# Altium PCB Activity_Recognition_Board_v1.0_PCB.PcbDoc
Units mm, origin at the board's own origin, x right, y up, seen from the top; angles counter-clockwise.
Board outline 34.16 x 42.91 mm, 4 copper layers (Top Layer, GND, VCC, Bottom Layer), stack 0.778 mm thick; 112 components, 87 nets, 431 pads, 115 vias.
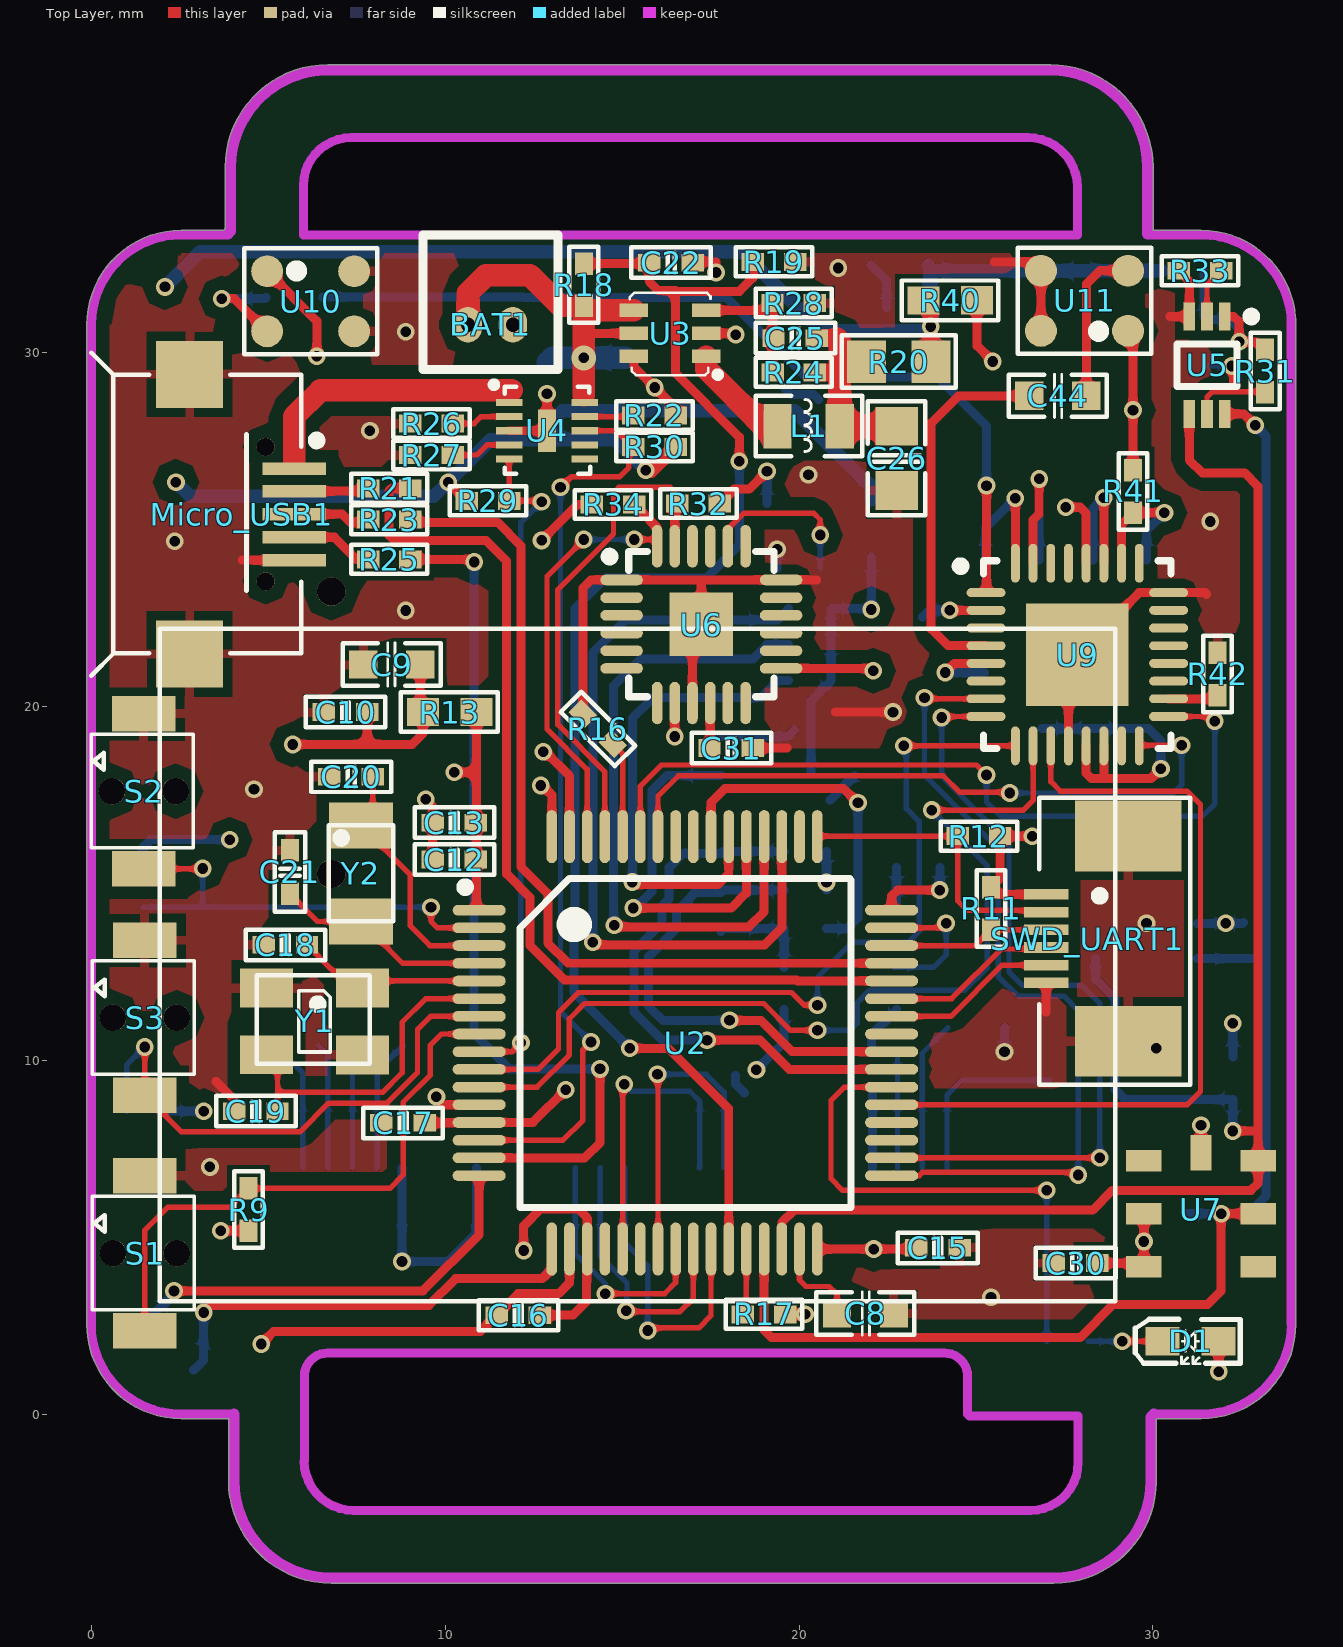
[diagram p0: Top Layer view]
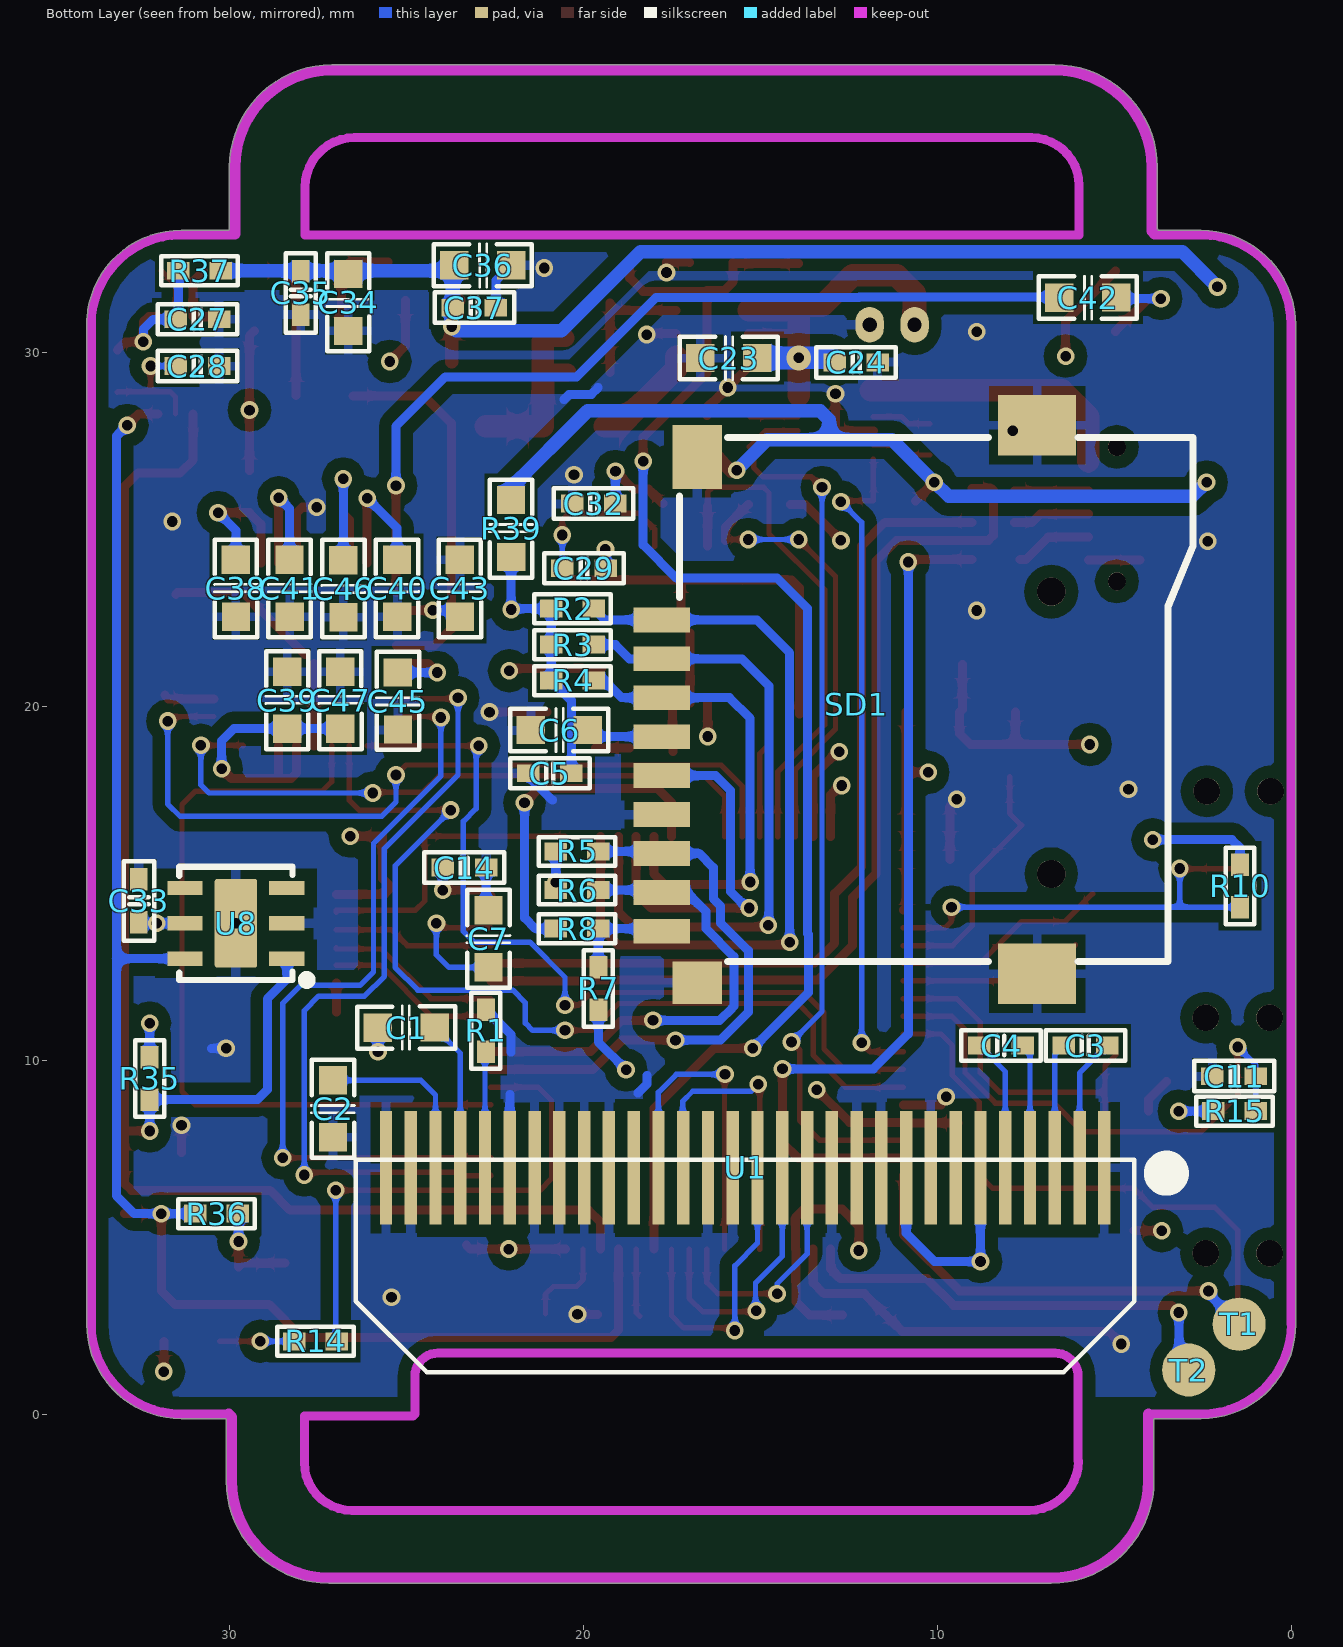
[diagram p1: Bottom Layer view, seen from below]
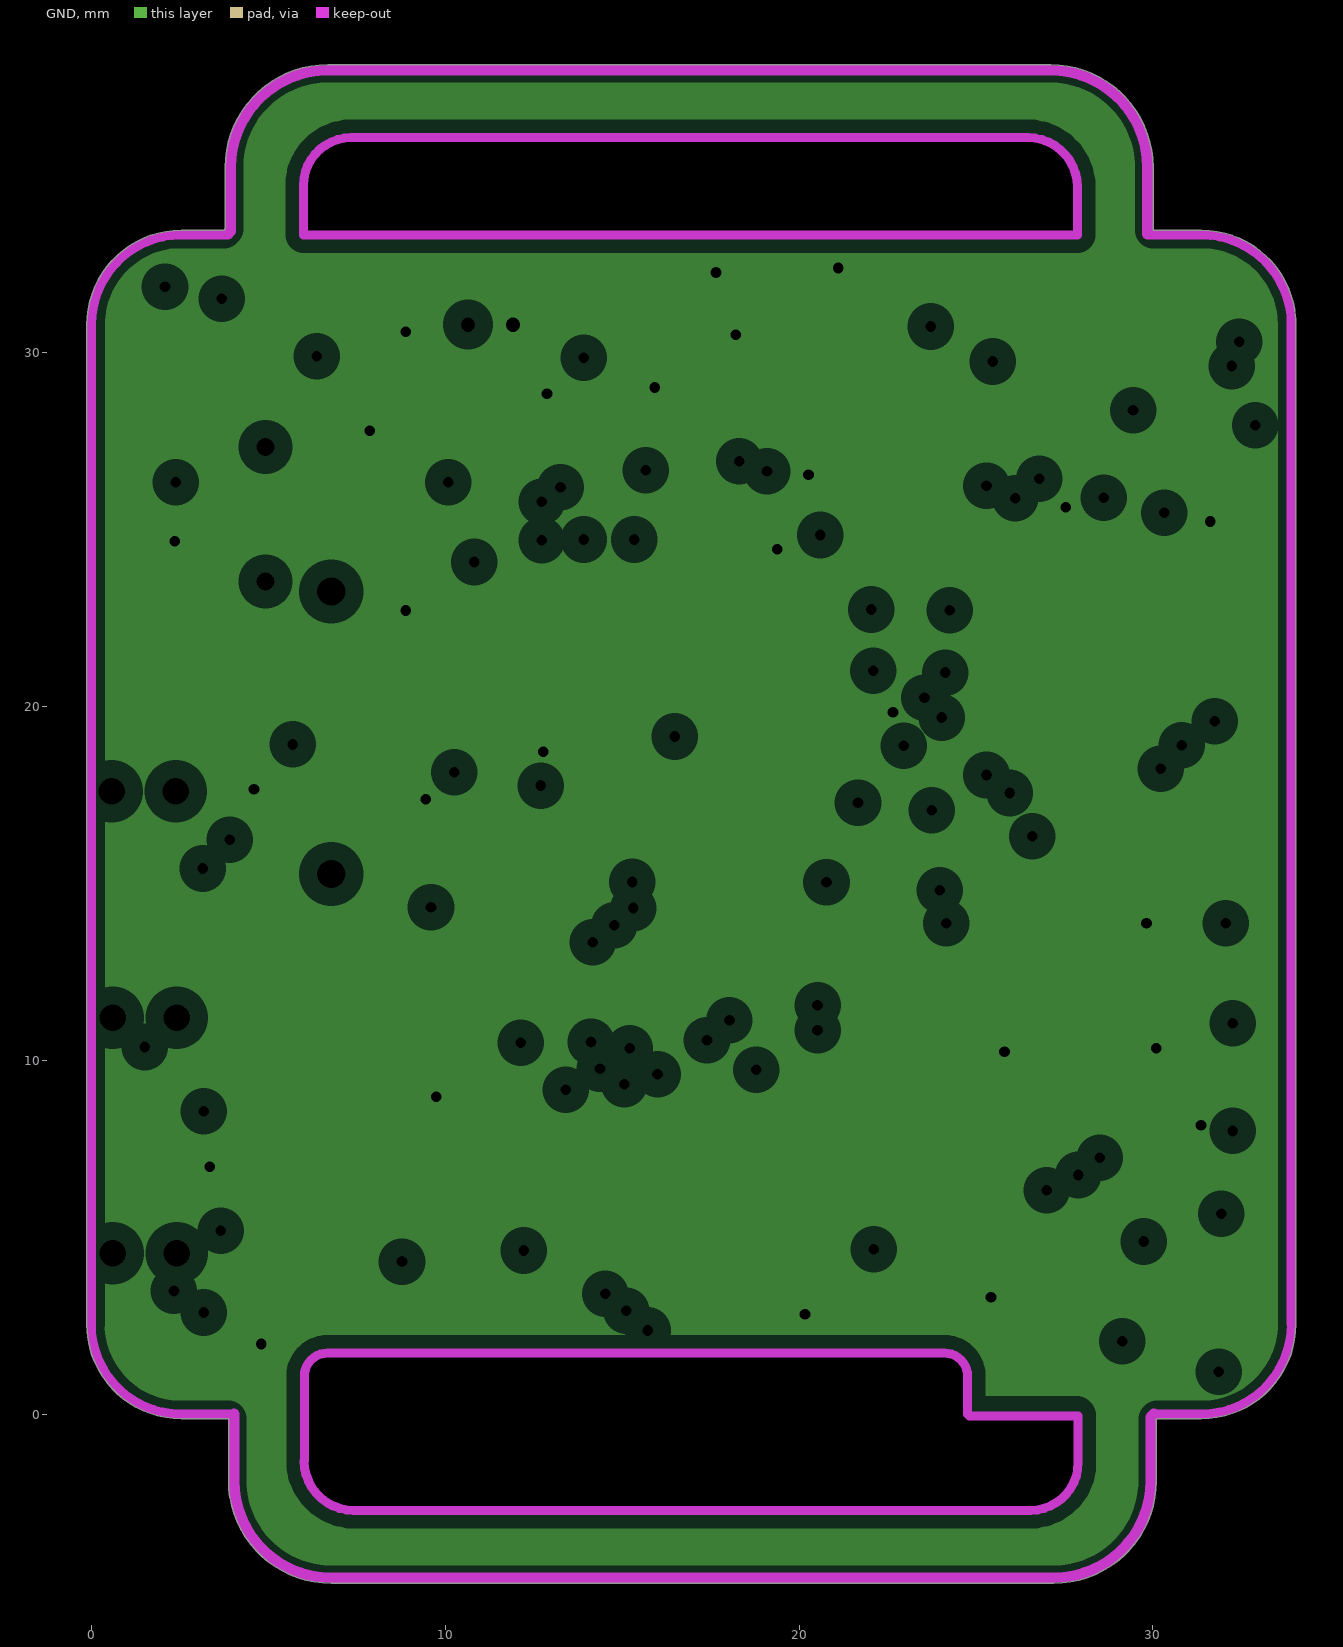
[diagram p2: GND, clearances drawn from the general rule]
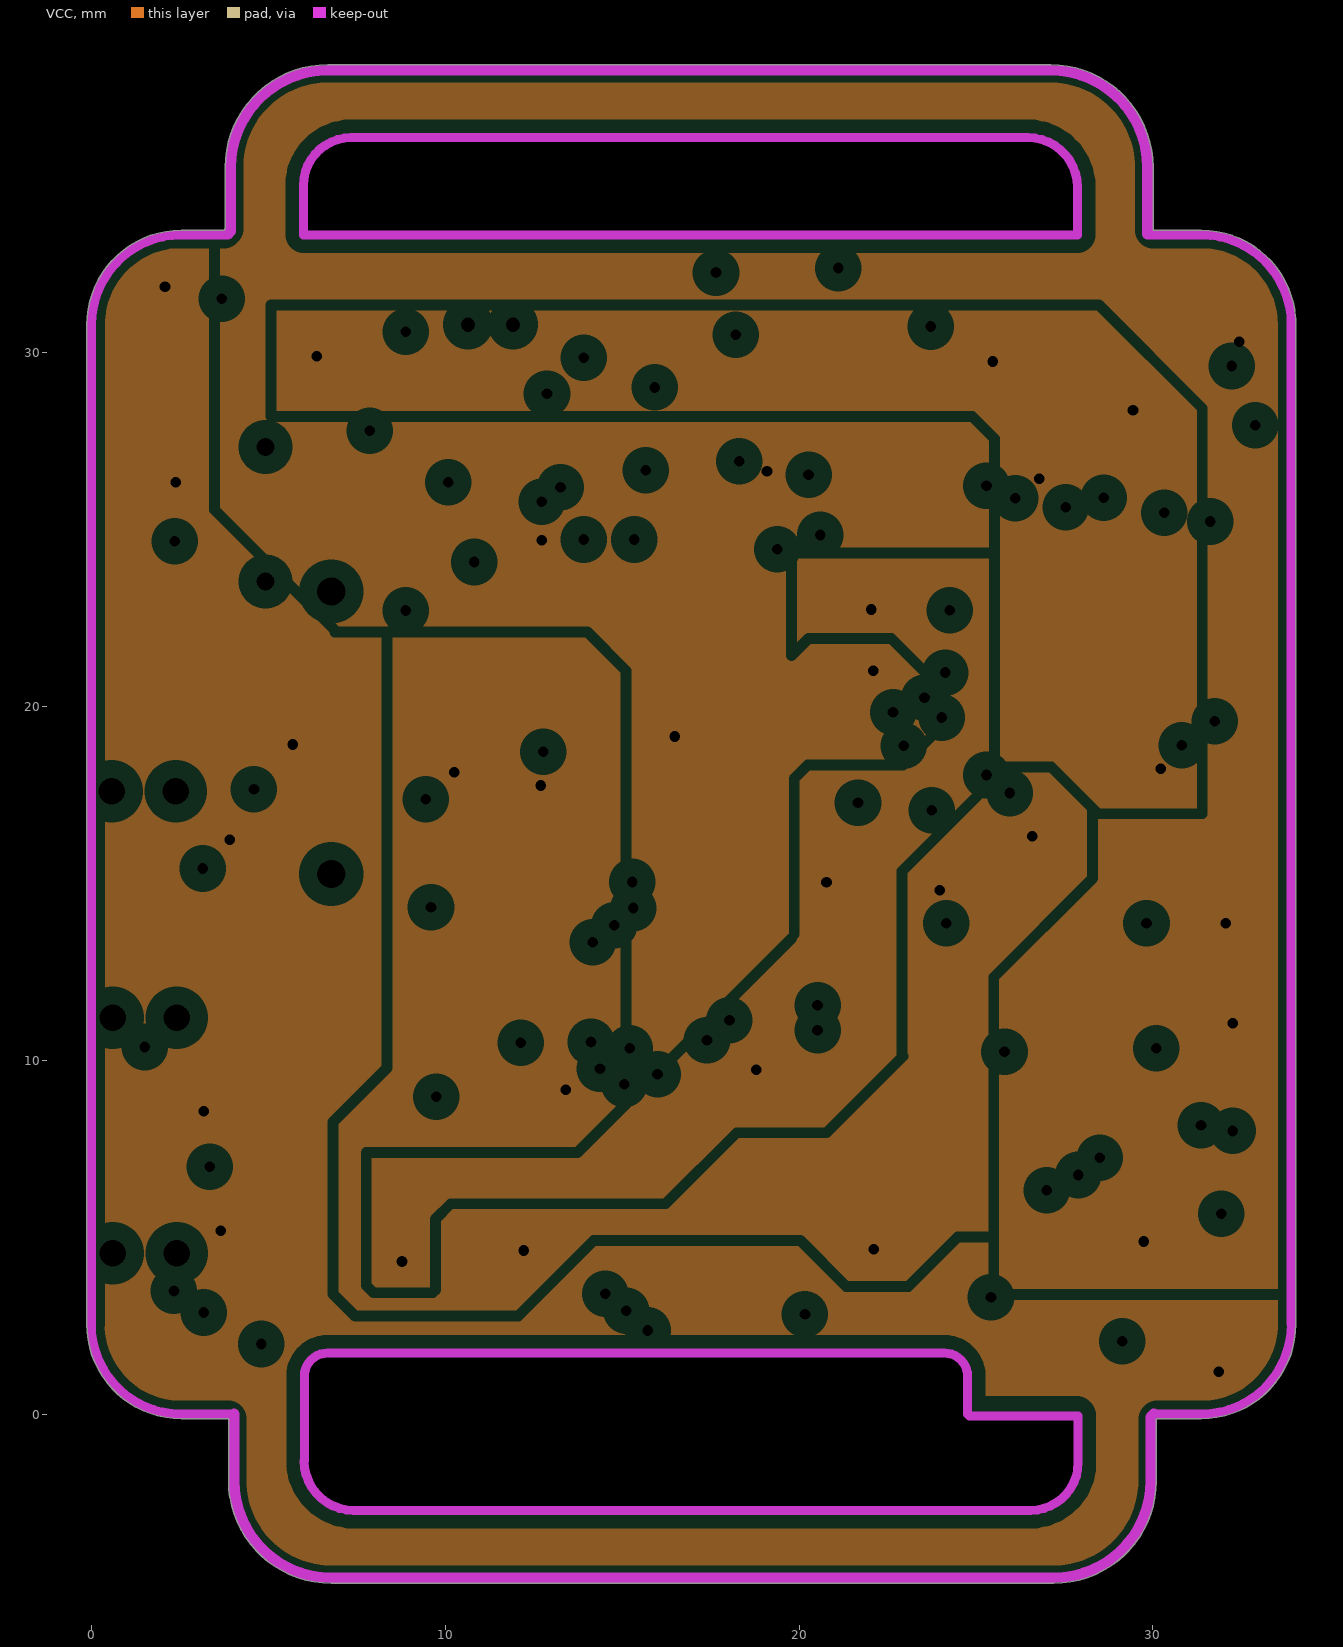
[diagram p3: VCC, clearances drawn from the general rule]

## Layer stack, top to bottom
Top Solder: solder mask 0.0102, Solder Resist, Dk 3.5
Top Layer: signal copper 0.0356
Dielectric 1: core 0.254, FR-4, Dk 4.2
GND: plane copper 0.036, net GND
Dielectric 3: prepreg 0.127, Dk 4.2
VCC: plane copper 0.036, net (Multiple Nets)
Dielectric 2: core 0.254, Dk 4.2
Bottom Layer: signal copper 0.0356
Bottom Solder: solder mask 0.0102, Solder Resist, Dk 3.5

## Board outline
-0.127,2.54 ccw(c2.54,2.54) 2.54,-0.127 3.881,-0.127 3.881,-1.883 ccw(c6.778,-1.883) 6.778,-4.78 27.199,-4.78 ccw(c27.199,-1.883) 30.096,-1.883 30.096,-0.143 30.111,-0.127 31.369,-0.127 ccw(c31.369,2.54) 34.036,2.54 34.036,30.937 ccw(c33.909,30.937) 34.029,30.979 ccw(c31.369,30.785) 31.369,33.452 30.003,33.452 30.003,35.233 ccw(c27.106,35.233) 27.106,38.13 6.684,38.13 ccw(c6.684,35.233) 3.787,35.233 3.787,33.493 3.753,33.458 ccw(c3.861,33.35) 3.747,33.452 2.545,33.452 ccw(c2.545,30.785) -0.122,30.785 -0.122,2.575 ccw(c0,2.54)
cut-out: 6.02,-1.322 ccw(c7.416,-1.322) 7.416,-2.718 26.541,-2.718 ccw(c26.541,-1.37) 27.889,-1.37 27.889,-0.051 ccw(c27.838,-0.051) 27.838,0 24.765,0 24.765,1.067 ccw(c24.105,1.067) 24.105,1.727 6.68,1.727 ccw(c6.68,1.067) 6.02,1.067
cut-out: 5.994,33.325 27.864,33.325 27.864,34.677 ccw(c26.472,34.677) 26.472,36.068 7.342,36.068 ccw(c7.342,34.72) 5.994,34.72

## Design rules (kind name [scope] priority, off if disabled: settings)
Clearance [All] p1: gap=0.152
ComponentClearance [All] p1: gap=0.254 collisioncheckmode=3 verticalgap=-0.254 showdistances=FALSE
MinimumSolderMaskSliver [All] p1: minsoldermaskwidth=-0.254
PlaneClearance [All] p1: clearance=0.508
PlaneConnect [All] p1: planeconnectstyle=Direct reliefexpansion=0.508 reliefentries=4 reliefconductorwidth=0.254 reliefairgap=0.254
PolygonConnect [All] p1: connectstyle=Relief reliefconductorwidth=0.254 reliefentries=4 polygonreliefangle="90 Angle" airgapwidth=0.254
RoomDefinition AR_Sensor [InComponentClass('AR_Sensor')] p1: confinementstyle=ConfineOut formatcopy=TRUE lockcomponents=FALSE outline 56.388,71.044 42.545,71.044 42.545,79.807 56.388,79.807
RoomDefinition AR_Power [InComponentClass('AR_Power')] p2: confinementstyle=ConfineOut formatcopy=TRUE lockcomponents=FALSE outline 40.132,69.647 27.813,69.647 27.813,79.68 40.132,79.68
RoomDefinition AR_Mcu [InComponentClass('AR_Mcu')] p3: confinementstyle=ConfineOut formatcopy=TRUE lockcomponents=FALSE outline 26.289,71.044 11.303,71.044 11.303,79.299 26.289,79.299
RoomDefinition AR_Display_store [InComponentClass('AR_Display_store')] p4: confinementstyle=ConfineOut formatcopy=TRUE lockcomponents=FALSE outline -22.733,67.742 -2.032,67.742 -2.032,78.918 -22.733,78.918
RoomDefinition AR_Audio [InComponentClass('AR_Audio')] p5: confinementstyle=ConfineOut formatcopy=TRUE lockcomponents=FALSE outline 10.033,70.917 -1.143,70.917 -1.143,78.918 10.033,78.918
RoutingVias [All] p1: holewidth=0.711 width=1.27 viastyle="Through Hole" minholewidth=0.3 minwidth=0.3 maxholewidth=0.711 maxwidth=1.27
SilkToBoardRegionClearance [All] p1 off:
SilkToSilkClearance [All] p1: silktosilkclearance=-0.254
SilkToSolderMaskClearance [IsPad] p1: minsilkscreentomaskgap=-0.254 clearancetoexposedcopper=TRUE
SolderMaskExpansion [All] p1: expansion=0.102
Width [All] p1: maxlimit=0.762 minlimit=0.152 preferedwidth=0.254
23 further rules are at their usual default settings.

## Classes and differential pairs
component class AR_Sensor: C27 C28 C29 C30 C31 C32 C33 C34 C35 R31 R32 R33 R34 R35 R36 R37 U5 U6 U7 U8
component class AR_Power: BAT1 C22 C23 C24 C25 C26 L1 Micro_USB1 R18 R19 R20 R21 R22 R23 R24 R25 R26 R27 R28 R29 R30 U3 U4
component class AR_Mcu: C7 C8 C9 C10 C11 C12 C13 C14 C15 C16 C17 C18 C19 C20 C21 D1 R9 R10 R11 R12 R13 R14 R15 R16 R17 S1 S2 S3 SWD_UART1 T1 T2 U2 Y1 Y2
component class AR_Display_store: C1 C2 C3 C4 C5 R1 R2 R3 R4 R5 R6 R7 R8 R39 SD1 U1
component class AR_Audio: C36 C37 C38 C39 C40 C41 C42 C43 C44 C45 C46 C47 R40 R41 R42 U9 U10 U11

## Components (designator, comment, footprint, x,y, rotation, side; value= is the part's Value field where it differs from the comment)
BAT1 "BAT" BHDR2_1.87 11.913,30.785 r180 top
C1 "Cap" C0603 24.206,10.922 r0 bottom
C2 "Cap" C0603 27.08,9.433 r270 bottom
C3 "Cap" C0402 5.202,10.414 r0 bottom
C4 "Cap" C0402 7.59,10.414 r0 bottom
C5 "Cap semi" C0402 21.565,18.11 r180 bottom
C6 "Cap semi" C0603 21.488,19.329 r180 bottom
C7 "Cap semi" C0603 22.686,14.234 r270 bottom
C8 "Cap semi" C0603 21.072,2.841 r0 top
C9 "Cap semi" C0603 9.296,21.184 r180 top
C10 "Cap semi" C0402 7.798,19.837 r180 top
C11 "Cap semi" C0402 2.226,9.55 r180 bottom
C12 "Cap semi" C0402 9.647,15.672 r0 top
C13 "Cap semi" C0402 9.647,16.713 r0 top
C14 "Cap semi" C0402 22.753,15.443 r0 bottom
C15 "Cap semi" C0402 24.536,4.699 r180 top
C16 "Cap semi" C0402 11.455,2.794 r0 top
C17 "Cap semi" C0402 8.199,8.23 r0 top
C18 "Cap semi" C0402 4.872,13.259 r0 top
C19 "Cap semi" C0402 4.039,8.56 r0 top
C20 "Cap semi" C0402 6.731,18.009 r0 top
C21 "Cap semi" C0402 5.613,15.931 r270 top
C22 "Cap semi" C0402 16.998,32.537 r180 top
C23 "Cap semi" C0603 16.697,29.841 r180 bottom
C24 "Cap semi" C0402 11.679,29.718 r0 bottom
C25 "Cap semi" C0402 19.279,30.404 r0 top
C26 "Cap semi" C0805 22.758,26.106 r90 top
C27 "Cap semi" C0402 30.297,30.937 r0 bottom
C28 "Cap semi" C0402 30.297,29.616 r0 bottom
C29 "Cap semi" C0402 20.599,23.901 r180 bottom
C30 "Cap semi" C0402 27.203,4.267 r0 top
C31 "Cap semi" C0402 17.47,18.821 r0 top
C32 "Cap semi" C0402 19.096,25.73 r0 bottom
C33 "Cap semi" C0402 32.563,15.118 r270 bottom
C34 "Cap semi" C0603 26.648,32.217 r270 bottom
C35 "Cap semi" C0402 27.991,32.293 r270 bottom
C36 "Cap semi" C0603 23.647,32.461 r180 bottom
C37 "Cap semi" C0402 23.698,31.267 r180 bottom
C38 "Cap semi" C0603 29.82,22.53 r90 bottom
C39 "Cap semi" C0603 28.368,19.371 r90 bottom
C40 "Cap semi" C0603 25.264,22.53 r90 bottom
C41 "Cap semi" C0603 28.301,22.53 r90 bottom
C42 "Cap semi" C0603 6.553,31.547 r180 bottom
C43 "Cap semi" C0603 23.491,22.53 r90 bottom
C44 "Cap semi" C0603 26.508,28.774 r0 top
C45 "Cap semi" C0603 25.248,20.955 r270 bottom
C46 "Cap semi" C0603 26.786,24.13 r270 bottom
C47 "Cap semi" C0603 26.869,19.371 r90 bottom
D1 "LED3" LED0603 31.859,2.057 r180 top
L1 "Inductor" L0805 19.393,27.915 r0 top
Micro_USB1 "Micro_USB" Micro_USB 0.628,25.43 r180 top
R1 "Res1" R0402 22.758,10.236 r90 bottom
R2 "Res3" R0402 19.708,22.758 r0 bottom
R3 "Res3" R0402 19.708,21.742 r0 bottom
R4 "Res3" R0402 19.708,20.726 r0 bottom
R5 "Res3" R0402 19.581,15.9 r0 bottom
R6 "Res3" R0402 19.581,14.808 r0 bottom
R7 "Res3" R0402 19.581,12.624 r270 bottom
R8 "Res3" R0402 19.581,13.716 r0 bottom
R9 "Res3" R0402 4.445,6.378 r270 top
R10 "Res3" R0402 1.448,14.326 r90 bottom
R11 "Res3" R0402 25.425,14.884 r270 top
R12 "Res3" R0402 25.679,16.332 r180 top
R13 "Res3" R0603 10.883,19.841 r180 top
R14 "Res3" R0402 26.972,2.057 r0 bottom
R15 "Res3" R0402 2.198,8.56 r180 bottom
R16 "Res3" R0402 14.74,18.941 r135 top
R17 "Res3" R0402 18.412,2.819 r0 top
R18 "Res2" R0402 13.919,31.316 r90 top
R19 "Res2" R0402 18.694,32.563 r0 top
R20 "Res3" R0805 23.724,29.743 r180 top
R21 "Res3" R0402 9.017,26.162 r180 top
R22 "Res3" R0402 16.51,28.219 r180 top
R23 "Res3" R0402 9.017,25.273 r180 top
R24 "Res2" R0402 19.253,29.439 r0 top
R25 "Res3" R0402 9.017,24.155 r180 top
R26 "Res2" R0402 9.017,27.991 r0 top
R27 "Res2" R0402 9.017,27.102 r0 top
R28 "Res3" R0402 20.447,31.394 r180 top
R29 "Res2" R0402 10.612,25.806 r0 top
R30 "Res2" R0402 16.51,27.33 r180 top
R31 "Res2" R0402 33.172,30.074 r270 top
R32 "Res2" R0402 16.561,25.73 r0 top
R33 "Res2" R0402 31.93,32.309 r180 top
R34 "Res2" R0402 15.342,25.705 r180 top
R35 "Res1" R0402 32.258,8.887 r90 bottom
R36 "Res1" R0402 30.965,5.664 r180 bottom
R37 "Res3" R0402 31.445,32.309 r180 bottom
R39 "Res2" C0603 22.043,24.222 r90 bottom
R40 "Res3" R0603 25.031,31.474 r180 top
R41 "Res3" R0402 29.439,26.67 r270 top
R42 "Res3" R0402 31.826,20.317 r90 top
S1 "SW-PB" MP34 1.513,2.352 r90 top
S2 "SW-PB" MP34 1.484,15.407 r90 top
S3 "SW-PB" MP34 1.513,9.006 r90 top
SD1 "SD Card" SDCARD-M 6.782,20.193 r180 bottom
SWD_UART1 "SWD_UART" FFC_6 28.143,13.437 r270 top
T1 "Test_Point" Test_Point 1.448,2.565 r180 bottom
T2 "Test_Point" Test_Point 2.87,1.27 r180 bottom
U1 "SSD1306" OLED_Bare 5.282,7.188 r0 top
U2 "STM32F405RG" LQFP64 16.764,10.49 r0 top
U3 "TPS62260" QFN-6 16.358,30.531 r180 top
U4 "BQ24040" WSON10 12.878,27.788 r0 top
U5 "BH1750FVI" WSOF6I 31.529,29.638 r270 top
U6 "MPU6050" QFN-24 14.986,23.571 r0 top
U7 "BMP180" LGA7 31.369,5.664 r0 top
U8 "Si7021-A20" Si7021-A10 29.82,13.868 r0 bottom
U9 "WM8978" QFN32 27.864,21.463 r0 top
U10 "MEMS_microphone" Microphone 6.198,31.445 r90 top
U11 "MEMS_microphone" Microphone 28.067,31.46 r270 top
Y1 "25M" 3225 7.669,12.04 r180 top
Y2 "32.768K" 3215 7.62,16.637 r270 top

## Footprints (in the part's own frame and the unit in brackets; to place one, negate y for a bottom-side part, rotate by r counter-clockwise, add the part's x,y. Pads: shape width x height; smd on the part's side, far side on the other; paste and mask are expansions set on the pad)
3215 [mm]
  rect 1.3x1.8 smd paste+0 mask+0.1: 1(0,0)
  rect 1.3x1.8 smd: 2(2.716,0)
  silkscreen extent 0,-0.91 2.72,0.91, body extent 0,-0.91 2.72,0.91, height 0.9
3225 [mm]
  rect 1.5x1.1 smd paste+0 mask+0.1: 1(0,0)
  rect 1.5x1.1 smd: 2(2.716,0) 3(2.716,1.885)
  rect 1.5x1.1 smd mask+0.1: 4(0,1.886)
  silkscreen extent -0.2,-0.36 3,2.14, body extent 0,-0.28 2.79,2.16, height 0.9
BHDR2_1.87 [mm]
  oval 0.8x1 hole 0.4: 1(0,0) 2(1.27,0)
  silkscreen extent -1.27,-2.54 2.54,1.27, body extent -1.27,-2.54 2.54,1.27, height 0.8
C0402 [mm]
  rect 0.635x0.5 smd: 1(0,0) 2(1.224,0)
  silkscreen extent -0.51,-0.43 1.74,0.43, body extent 0.01,-0.26 1.22,0.27, height 0.8
C0603 [mm]
  rect 0.8x0.8 smd: 1(0,0) 2(1.61,0.004)
  silkscreen extent -0.58,-0.61 2.18,0.61, body extent 0,-0.4 1.61,0.41, height 0.9
C0805 [mm]
  rect 1.1x1.2 smd: 1(-0.008,0) 2(1.808,0)
  silkscreen extent -0.71,-0.82 2.51,0.81, body extent -0.05,-0.6 1.81,0.61, height 0.8
FFC_6 [mm]
  rect 2x3 smd: 0(-2.902,1.158) 0(2.902,1.158)
  rect 0.3x1.25 smd: 1(-1.248,-1.158) 2(-0.748,-1.158) 3(-0.248,-1.158) 4(0.252,-1.158) 5(0.752,-1.158) 6(1.252,-1.158)
  silkscreen extent -3.99,-1.36 4.13,2.92, body extent -1.81,-1.12 1.79,2.68, height 1
L0805 [mm]
  rect 0.8x1.25 smd: 1(0,0) 2(1.755,0)
  silkscreen extent -0.62,-0.85 2.39,0.87, body extent 0.02,-0.62 1.76,0.65, height 0.9
LED0603 [mm]
  rect 0.96x0.8 smd: 1(0,0) 2(1.582,0)
  silkscreen extent -0.61,-0.62 2.36,0.64, body extent -0.04,-0.39 1.61,0.4, height 0.8
LGA7 [mm] "LGA, 7-Leads, Body 3.60x3.80mmx1.00mm, Pitch 1.50mm"
  rect 1x0.6 smd: 1(-1.623,1.497) 2(-1.623,-0.003) 3(-1.623,-1.503) 4(1.603,-1.503) 5(1.603,-0.003) 6(1.603,1.497)
  rect 0.6x1 smd: 7(-0.01,1.726)
  body extent -1.8,-1.9 1.8,1.9, height 1
LQFP64 [mm] "LQFP64"
  oval 1.5x0.3 smd: 1(-5.802,3.75) 2(-5.802,3.25) 3(-5.802,2.75) 4(-5.802,2.25) 5(-5.802,1.75) 6(-5.802,1.25) 7(-5.802,0.75) 8(-5.802,0.25) 9(-5.802,-0.25) 10(-5.802,-0.75) 11(-5.802,-1.25) 12(-5.802,-1.75) 13(-5.802,-2.25) 14(-5.802,-2.75) 15(-5.802,-3.25) 16(-5.802,-3.75) 33(5.852,-3.75) 34(5.852,-3.25) 35(5.852,-2.75) 36(5.852,-2.25) 37(5.852,-1.75) 38(5.852,-1.25) 39(5.852,-0.75) 40(5.852,-0.25) 41(5.852,0.25) 42(5.852,0.75) 43(5.852,1.25) 44(5.852,1.75) 45(5.852,2.25) 46(5.852,2.75) 47(5.852,3.25) 48(5.852,3.75)
  oval 0.3x1.5 smd: 17(-3.75,-5.827) 18(-3.25,-5.827) 19(-2.75,-5.827) 20(-2.25,-5.827) 21(-1.75,-5.827) 22(-1.25,-5.827) 23(-0.75,-5.827) 24(-0.25,-5.827) 25(0.25,-5.827) 26(0.75,-5.827) 27(1.25,-5.827) 28(1.75,-5.827) 29(2.25,-5.827) 30(2.75,-5.827) 31(3.25,-5.827) 32(3.75,-5.827) 49(3.75,5.827) 50(3.25,5.827) 51(2.75,5.827) 52(2.25,5.827) 53(1.75,5.827) 54(1.25,5.827) 55(0.75,5.827) 56(0.25,5.827) 57(-0.25,5.827) 58(-0.75,5.827) 59(-1.25,5.827) 60(-1.75,5.827) 61(-2.25,5.827) 62(-2.75,5.827) 63(-3.25,5.827) 64(-3.75,5.827)
  silkscreen extent -6.32,-4.65 4.7,4.65, body extent -4.67,-4.65 4.7,4.65, height 0.9
Micro_USB [mm]
  rect 1.8x0.35 smd: 1(-5.106,-1.287) 2(-5.106,-0.65) 3(-5.106,0) 4(-5.106,0.65) 5(-5.106,1.3)
  round 0.508 hole 0.508 unplated: MH1(-4.3,1.9) MH2(-4.3,-1.9)
  rect 1.9x1.9 smd: ""(-2.15,3.95) ""(-2.15,-3.95)
  silkscreen extent -5.87,-4.57 0.63,4.57, body extent -5.19,-3.79 -0.16,3.79, height 0.9
Microphone [mm]
  round 0.9 smd: 1(0.85,1.23) 2(0.85,-1.23) 3(-0.85,-1.23) 4(-0.85,1.23)
  silkscreen extent -1.5,-1.88 1.5,1.88, body extent -1.44,-1.83 1.42,1.78, height 0.8
MP34 [mm]
  round 0.75 hole 0.75: 0(2.195,-0.9) 0(2.195,0.9)
  rect 1x1.8 smd: 1(0,0) 2(4.38,0)
  silkscreen extent 0.6,-1.4 3.81,1.49, body extent 0.59,-1.41 3.81,1.41, height 0.9
OLED_Bare [mm]
  rect 0.35x3.2 smd far side: 1(0,-0.229) 2(0.7,-0.229) 3(1.4,-0.229) 4(2.1,-0.229) 5(2.8,-0.229) 6(3.5,-0.229) 7(4.2,-0.229) 8(4.9,-0.229) 9(5.6,-0.229) 10(6.3,-0.229) 11(7,-0.229) 12(7.7,-0.229) 13(8.4,-0.229) 14(9.1,-0.229) 15(9.8,-0.229) 16(10.5,-0.229) 17(11.2,-0.229) 18(11.9,-0.229) 19(12.6,-0.229) 20(13.3,-0.229) 21(14,-0.229) 22(14.7,-0.229) 23(15.4,-0.229) 24(16.1,-0.229) 25(16.8,-0.229) 26(17.5,-0.229) 27(18.2,-0.229) 28(18.9,-0.229) 29(19.6,-0.229) 30(20.3,-0.229)
  silkscreen extent -3.35,-4 23.65,15, body extent -3.18,-3.84 23.49,14.85, height 0.9
QFN32 [mm] "QFN, 32-Leads, Body 5.00x5.00mm, Pitch 0.50mm, Thermal Pad 2.90x2.90mm, IPC Medium Density"
  oval 1.1x0.25 smd: 1(-2.58,1.75) 2(-2.58,1.25) 3(-2.58,0.75) 4(-2.58,0.25) 5(-2.58,-0.25) 6(-2.58,-0.75) 7(-2.58,-1.25) 8(-2.58,-1.75) 17(2.58,-1.75) 18(2.58,-1.25) 19(2.58,-0.75) 20(2.58,-0.25) 21(2.58,0.25) 22(2.58,0.75) 23(2.58,1.25) 24(2.58,1.75)
  oval 0.25x1.1 smd: 9(-1.75,-2.58) 10(-1.25,-2.58) 11(-0.75,-2.58) 12(-0.25,-2.58) 13(0.25,-2.58) 14(0.75,-2.58) 15(1.25,-2.58) 16(1.75,-2.58) 25(1.75,2.581) 26(1.25,2.581) 27(0.75,2.581) 28(0.25,2.581) 29(-0.25,2.581) 30(-0.75,2.581) 31(-1.25,2.581) 32(-1.75,2.581)
  rect 2.9x2.9 smd: 33(0,0)
  silkscreen extent -3.42,-2.65 2.65,2.65, body extent -2.5,-2.5 2.5,2.5, height 1
QFN-6 [mm] "SON, 6-Leads, Body 2.00x2.00mm, Pitch 0.65mm, Thermal Pad 1.60x0.74mm, IPC Medium Density"
  rect 0.8x0.381 smd: 1(-1.024,0.64) 2(-1.024,-0.01) 3(-1.024,-0.66) 4(1.024,-0.66) 5(1.024,-0.01) 6(1.024,0.64)
  silkscreen extent -1.4,-1.15 1.14,1.21, body extent -0.95,-0.96 0.95,0.94, height 0.8
QFN-24 [mm]
  rect 1.8x1.8 smd: 0(2.253,-1.25)
  oval 1.2x0.3 smd: 1(0,0) 2(0,-0.5) 3(0,-1) 4(0,-1.5) 5(0,-2) 6(0,-2.5) 13(4.506,-2.5) 14(4.506,-2) 15(4.506,-1.5) 16(4.506,-1) 17(4.506,-0.5) 18(4.506,0)
  oval 0.3x1.2 smd: 7(1.003,-3.478) 8(1.503,-3.478) 9(2.003,-3.478) 10(2.503,-3.478) 11(3.003,-3.478) 12(3.503,-3.478) 19(3.503,0.952) 20(3.003,0.952) 21(2.503,0.952) 22(2.003,0.952) 23(1.503,0.952) 24(1.003,0.952)
  silkscreen extent -0.47,-3.3 4.3,0.8, body extent 0.2,-3.3 4.3,0.8, height 0.9
R0402 [mil]
  rect 25x20 smd: 1(0,0) 2(47.1,0)
  silkscreen extent -19,-16 66,16, body extent -1,-11 50,11, height 31
R0603 [mm]
  rect 0.91x0.8 smd: 1(0,0) 2(1.511,0.004)
  silkscreen extent -0.6,-0.56 2.13,0.56, body extent -0.04,-0.39 1.61,0.4, height 0.8
R0805 [mm]
  rect 1.1x1.2 smd: 1(0,0) 2(1.816,0)
  silkscreen extent -0.71,-0.74 2.51,0.74, body extent -0.04,-0.6 1.82,0.61, height 0.8
SDCARD-M [mm] "TF卡"
  round 0.8 hole 0.8: 0(0,-4.93) 0(0,3.05)
  rect 1.6x0.7 smd: 1(-11.008,2.25) 2(-11.008,1.15) 3(-11.008,0.05) 4(-11.008,-1.05) 5(-11.008,-2.15) 6(-11.008,-3.25) 7(-11.008,-4.35) 8(-11.008,-5.45) 9(-11.008,-6.55)
  rect 1.4x1.2 smd: 10(-10,-8.004)
  rect 2.2x1.7 smd: 11(-0.4,-7.75) 13(-0.4,7.75)
  rect 1.4x1.8 smd: 12(-10,6.85)
  silkscreen extent -10.5,-7.4 4,7.4, body extent -10.33,-7.26 3.83,7.26, height 0.9
Si7021-A10 [mm] "SON, 6-Leads, Body 2.85x2.85mm, Pitch 1.00mm, Thermal Pad 2.40x1.48mm, IPC Medium Density"
  rrect10% 1.2x2.5 smd: 0(0,0)
  rect 1x0.4 smd: 1(-1.44,1) 2(-1.44,0) 3(-1.44,-1) 4(1.44,-1) 5(1.44,0) 6(1.44,1)
  silkscreen extent -2.05,-1.6 1.6,1.65, body extent -1.45,-1.45 1.45,1.45, height 1.2
Test_Point [mm]
  round 1.5 smd: 1(-0.025,-0.025)
WSOF6I [mm] "SOTFL, 6-Leads, Body 1.60x3.00mm, Pitch 0.50mm, IPC Medium Density"
  rect 0.8x0.33 smd: 1(-1.375,0.5) 2(-1.375,0) 3(-1.375,-0.5) 4(1.375,-0.5) 5(1.375,0) 6(1.375,0.5)
  silkscreen extent -1.5,-0.85 0.6,1.38, body extent -1.35,-0.85 1.35,0.85, height 0.75
WSON10 [mm]
  rect 0.5x1.2 smd: 0(0,0)
  rect 0.75x0.2 smd: 1(-1.072,0.8) 2(-1.072,0.4) 3(-1.072,0) 4(-1.072,-0.4) 5(-1.072,-0.8) 6(1.072,-0.8) 7(1.072,-0.4) 8(1.072,0) 9(1.072,0.4) 10(1.072,0.8)
  silkscreen extent -1.55,-1.22 1.22,1.35, body extent -1.05,-1.05 1.05,1.05, height 0.8

## Part data
BAT1: library part BAT_CN, "BAT_CN"
C1 C2 C3 C4: "Capacitor"
C5 C6 C7 C8 C9 C10 C11 C12 C13 C14 C15 C16 C17 C18 C19 C20 C21 C22 C23 C24 C25 C26 C27 C28 C29 C30 C31 C32 C33 C34 C35 C36 C37 C38 C39 C40 C41 C42 C43 C44 C45 C46 C47: "Capacitor (Semiconductor SIM Model)"
D1: "Typical BLUE SiC LED"
Micro_USB1: library part Micri_USB
R1 R2 R3 R4 R5 R6 R7 R8 R9 R10 R11 R12 R13 R14 R15 R16 R17 R18 R19 R20 R21 R22 R23 R24 R25 R26 R27 R28 R29 R30 R31 R32 R33 R34 R35 R36 R37 R39 R40 R41 R42: "Resistor"
S1 S2 S3: "Switch"
SD1: library part Micro_SD_Card, "SD card socket"
U3: "DC-DC buck"
Y1 Y2: library part XTAL, "Crystal Oscillator"

## Via types
v1: diameter 0.5, hole 0.3, Top Layer to Bottom Layer, tented both sides, 114 vias
v2: diameter 0.7, hole 0.3, Top Layer to Bottom Layer, tented both sides, 1 vias

## Nets (pads, with @x,y where several pads share a name; then routed paths per layer and width w, separated by ;. In a path a pad name is that pad's centre, name@x,y a point inside that pad or via, vN(x,y) a via of type N, cw(c..) or ccw(c..) an arc to the next point about the centre after c; other vN are vias at no path point)
3V3: C9.1 C10.1 C34.1 C35.1 C36.1 C37.1 D1.1 R9.2 R10.2 R13.2 R15.1 R20.1 R29.1 R30.1 R37.2 R39.2 R40.2 | length 72.9
  Top Layer w0.254: v1(3.658,5.182) R9.2 ; v1(5.69,18.923) 7.798,18.923 ; C10.1 7.798,18.923 ; C9.1 9.296,19.914 R13.2 9.373,19.228 9.068,18.923 7.798,18.923 ; v1(10.084,26.335) R29.1 ; v1(31.859,1.201) D1.1
  Top Layer w0.381: v1(15.672,26.67) 15.799,26.67 15.824,26.645 R30.1 ; R40.2 23.724,31.267 v1(23.724,30.734) R20.1
  Bottom Layer w0.254: R10.2 1.448,16.002 1.676,16.231 v1(3.912,16.231) ; R15.1 v1(3.175,8.56)
  Bottom Layer w0.381: v1(2.083,31.852) 3.082,32.851 18.381,32.851 20.625,30.607 23.597,30.607 v1(23.724,30.734) 23.724,31.242 C37.1 C36.1@23.698,32.41 ; v1(2.393,26.335) 2.794,25.933 9.682,25.933 v1(10.084,26.335) 11.283,27.534 13.056,27.534 ; v1(15.672,26.67) 14.808,27.534 13.056,27.534 ; R39.2 22.047,26.137 22.094,26.137 19.884,28.346 13.31,28.346 13.056,28.092 13.056,27.534 ; C36.1 C36.1@23.698,32.41 ; R37.2 23.8,32.309 C36.1@23.698,32.41
3V3_OLED: C5.2 C6.2 R2.2 R3.2 R4.2 R5.2 R6.2 R7.2 R39.1 SD1.4 U1.6 U1.9 | length 19.8
  Bottom Layer w0.254: U1.6 v1(8.782,4.311) 10.077,4.311 10.882,5.116 U1.9 ; SD1.4 19.688,19.143 C6.2 ; v1(18.796,9.728) 19.581,10.513 R7.2 ; C5.2 20.34,20.163 R4.2 R3.2 R2.2 22.022,22.758 v1(22.043,22.737) R39.1 ; R5.2 v1(20.777,15.024) R6.2 R6.2@20.809,14.84
BH_VCC: C27.2 C30.2 C32.1 C33.2 R31.1 R32.2 R34.2 R35.2 R36.2 R37.1 U5.1 U6.8 U6.13 U7.2 U7.3 U8.5 | length 18.7
  Top Layer w0.254: v1(12.725,24.689) 13.741,25.705 R34.2 ; v1(16.489,19.147) U6.8 ; R32.2 18.164,26.137 18.593,26.137 v1(19.096,26.64) ; U6.13 21.956,21.071 22.098,20.93 v1(22.098,21.006) ; C30.2 29.64,4.267 U7.3 v1(29.746,4.877) U7.2 ; U5.1 32.283,31.013 32.436,30.861 v1(32.436,30.302) 32.944,30.302 R31.1
  Bottom Layer w0.254: C32.1 v1(19.096,26.64) ; v1(29.746,4.877) 29.746,5.641 R36.2 ; U8.5 v1(32.055,13.868) 32.537,13.868 C33.2 ; R37.1 31.445,31.013 C27.2 32.156,30.937 32.436,30.658 v1(32.436,30.302) ; R35.2 v1(32.258,11.049)
BOOT0: R16.1 U2.60 | length 2.7
  Top Layer w0.152: R16.1 15.014,18.666 U2.60
BOOT1: R17.1 U2.28 | length 1.9
  Top Layer w0.152: R17.1@18.415,2.769 18.514,2.868 U2.28
CHG_STAT: R30.2 U2.14 U4.8 | length 25.9
  Top Layer w0.152: U2.14 13.328,7.74 13.89,8.302 13.89,10.283 v1(14.122,10.516) ; v1(13.259,26.187) 13.564,26.492 14.935,26.492 15.193,26.75 15.193,27.21 R30.2 15.308,27.33 14.851,27.788 U4.8
  Bottom Layer w0.152: v1(13.259,26.187) 13.259,11.379 v1(14.122,10.516)
DVI: C28.2 R31.2 U5.5 | length 3.6
  Top Layer w0.152: U5.5 31.529,28.735 31.686,28.892 32.233,28.892 ; v1(32.233,29.616) 32.233,28.892 ; R31.2 33.158,28.892 32.233,28.892
  Bottom Layer w0.152: C28.2 v1(32.233,29.616)
GND: BAT1.1 C1.2 C2.2 C5.1 C6.1 C7.1 C8.2 C9.2 C10.2 C11.1 C12.1 C13.1 C14.1 C15.1 C16.1 C17.1 C18.1 C19.1 C20.1 C21.1 C22.1 C23.1 C24.1 C26.1 C27.1 C28.1 C29.2 C30.1 C31.2 C32.2 C33.1 C34.2 C35.2 C36.2 C37.2 C38.1 C39.2 C40.1 C41.1 C43.2 C45.2 C46.2 C47.2 Micro_USB1. Micro_USB1.5 R1.2 R16.2 R17.2 R19.2 R22.1 R26.1 R27.1 R28.1 R33.2 R42.2 S1.2 S2.2 S3.2 SD1.6 SD1.10 SD1.11 SD1.12 SD1.13 SWD_UART1.0 SWD_UART1.6 U1.1 U1.8 U1.10 U1.11 U1.12 U1.16 U1.17 U1.21 U1.22 U1.23 U1.24 U1.25 U1.29 U1.30 U2.12 U2.18 U2.63 U3.2 U3.6 U4.0 U4.3 U5.3 U6.0 U6.1 U6.9 U6.18 U7.7 U8.0 U8.2 U9.12 U9.24 U9.28 U9.33 U10.2 U10.3 U11.2 U11.3 Y1.2 Y1.4 | length 67.4
  Top Layer w0.254: 3.531,9.398 4.039,8.89 C19.1 ; 4.267,24.13 Micro_USB1.5 ; v1(4.801,1.981) 5.156,2.337 10.998,2.337 C16.1 12.064,3.402 13.207,3.402 13.514,3.71 U2.18 ; v1(7.874,27.788) v1@7.95,27.788 ; v1(9.449,17.374) 9.647,17.175 C13.1 C12.1 ; v1(9.754,8.966) 9.754,8.89 9.903,8.74 U2.12 ; U4.3 U4.0 v1(12.878,28.829) ; v1(12.776,18.72) 12.827,18.72 13.514,18.033 U2.63 ; R16.2 13.894,23.343 14.122,23.571 U6.1 U6.18 20.498,23.571 ; U3.6 15.334,29.599 v1(15.922,29.011) 16.51,28.423 R22.1 ; U6.9 U6.0@16.989,22.071 ; C22.1 17.023,32.563 17.653,32.563 v1(17.653,32.258) ; U6.0 17.239,23.437 ; U3.2 18.176,30.541 v1(18.212,30.505) ; C31.2 19.66,18.821 ; R17.2 v1(20.168,2.819) ; 21.031,19.837 v1(22.657,19.837) ; v1@21.107,32.309 v1(21.107,32.385) ; 25.527,32.563 26.584,32.563 U11.3 U11.2 ; 26.985,11.364 SWD_UART1.6 ; v1(27.534,25.629) 27.94,25.629 28.114,25.455 U9.28 ; U9.12 U9.33@27.614,21.213 ; U9.33 29.614,23.213 U9.24 31.473,23.213 31.521,23.165 ; 30.48,31.013 U5.3 31.029,32.013 R33.2 ; U7.7 v1(31.359,8.164)
  Bottom Layer w0.254: 18.211,9.566 18.211,9.323 18.466,9.068 ; C29.2 19.375,24.43 v1(19.38,24.435) ; 19.583,29.007 19.774,28.816 20.409,28.816 20.549,28.677 ; 20.879,17.348 C5.1@21.565,18.034 ; C36.2 22.474,32.029 C37.2 ; 22.047,10.236 22.047,10.721 R1.2 ; U1.25 22.082,9.033 ; C7.1@22.753,14.301 C14.1 ; v1(25.806,10.236) 25.806,10.909 C1.2 ; v1(30.099,10.338) 30.505,10.338
  other v1: 25.425,3.302 3.353,6.985 29.82,13.868 4.597,17.653 8.89,22.708 2.362,24.663 31.623,25.222 20.269,26.543 8.89,30.582
I2C_SCL: U2.58 U9.16 | length 18.8
  Top Layer w0.152: U2.58 16.014,17.462 16.59,18.038 24.075,18.038 24.536,17.577 v1@25.959,17.577 ; U9.16 29.628,18.898 v1(30.81,18.898)
  Bottom Layer w0.152: v1(25.959,17.551) 30.582,17.551 30.81,17.78 v1(30.81,18.898)
I2C_SDA: U2.59 U9.17 | length 22.8
  Top Layer w0.152: U2.59 15.514,17.749 16.108,18.343 25.015,18.343 v1(25.298,18.059) ; U9.17 31.62,19.713 v1(31.75,19.583)
  Bottom Layer w0.152: v1(25.298,18.059) 25.298,17.297 25.705,16.891 31.394,16.891 31.75,17.247 v1(31.75,19.583)
I2S_CK: U2.34 U9.8 | length 22.4
  Top Layer w0.152: U2.34 v1(28.499,7.24) ; v1(24.028,19.685) 24.056,19.713 U9.8
  Bottom Layer w0.152: v1(24.028,19.685) 24.028,18.034 25.933,16.129 25.933,12.496 26.314,12.116 27.991,12.116 28.499,11.608 v1(28.499,7.24)
I2S_EXT_SD: U2.10 U9.9 | length 24
  Top Layer w0.152: U2.10 12.624,9.74 13.204,10.32 13.204,11.35 13.767,11.913 19.787,11.913 20.142,11.557 v1(20.523,11.557) ; v1(22.962,18.883) U9.9
  Bottom Layer w0.152: v1(20.523,11.557) 20.523,12.344 21.514,13.335 23.089,13.335 23.393,13.64 23.393,16.748 23.034,17.107 23.034,18.811 v1(22.962,18.883)
I2S_MCK: U2.37 U9.11 | length 22.5
  Top Layer w0.152: U2.37 30.965,8.74 31.344,9.119 31.344,17.221 30.963,17.602 27.381,17.602 27.114,17.87 U9.11
I2S_SD: U2.11 U9.10 | length 26.9
  Top Layer w0.152: U2.11 12.598,9.24 13.509,10.151 13.509,11.172 13.941,11.604 19.003,11.604 19.761,10.846 v1(20.523,10.846) ; v1(23.749,17.069) 26.34,17.069 26.614,17.343 U9.10
  Bottom Layer w0.152: v1(20.523,10.846) 21.438,10.846 21.641,11.049 21.641,11.623 21.996,11.979 24.679,11.979 25.324,12.624 25.324,15.494 v1(23.749,17.069)
I2S_WS: U2.33 U9.7 | length 23.2
  Top Layer w0.152: U2.33@22.679,6.803 U2.33 23.393,6.74 23.486,6.833 27.813,6.833 v1(27.889,6.756) ; v1(23.546,20.244) 23.577,20.213 U9.7
  Bottom Layer w0.152: v1(23.546,20.244) 23.546,18.059 25.629,15.977 25.629,12.37 26.187,11.811 27.483,11.811 27.889,11.405 v1(27.889,6.756)
KEY_DN: R10.1 S2.1 U2.2 | length 12.8
  Top Layer w0.152: S2.1 3.139,15.407 v1(3.15,15.418) ; v1(9.601,14.326) 9.601,13.919 9.78,13.74 U2.2
  Bottom Layer w0.152: R10.1 3.15,14.326 ; v1(3.15,15.418) 3.15,14.326 ; v1(9.601,14.326) 3.15,14.326
KEY_UP: R9.1 S1.1 U2.8 | length 16.3
  Top Layer w0.152: S1.1 1.513,5.196 2.159,5.842 3.909,5.842 R9.1 8.435,6.378 8.814,6.756 8.814,8.812 9.576,9.574 9.576,10.414 9.902,10.74 U2.8
LED1: R14.1 U2.38 | length 14.6
  Top Layer w0.152: U2.38 21.28,9.24 20.904,8.865 20.904,6.655 21.234,6.325 v1(27,6.325)
  Bottom Layer w0.152: R14.1@27,2.057 v1(27,6.325)
MCU_3V3: C12.2 C13.2 C14.2 C15.2 C16.2 C17.2 R11.1 R12.1 R13.1 SWD_UART1.1 U2.1 U2.13 U2.19 U2.32 U2.48 U2.64 | length 28.3
  Top Layer w0.254: C17.2 10.952,8.23 U2.13 12.482,8.24 v1(13.411,9.169) ; v1(10.262,18.136) 10.883,18.136 ; R13.1 10.883,18.136 ; U2.1 10.883,14.319 10.883,18.136 ; v1(12.217,4.623) 12.217,5.315 12.7,5.798 13.76,5.798 14.014,5.544 U2.19 13.999,4.649 13.999,3.184 13.609,2.794 C16.2 ; v1@12.7,17.812 13.014,17.498 U2.64 ; U2.32 v1(22.113,4.663) 23.2,4.663 C15.2@23.312,4.775 ; U2.48 22.616,14.641 22.784,14.808 v1(23.978,14.808) ; v1(26.594,16.332) R12.1 25.679,15.138 R11.1 25.625,14.685 SWD_UART1.1
  Bottom Layer w0.254: v1(23.978,14.808) C14.2
  other v1: 12.7,17.762
MIC_BIAS: C40.2 U9.32 | length 3.9
  Top Layer w0.254: U9.32 v1(26.114,25.88)
  Bottom Layer w0.254: C40.2 25.268,25.034 v1(26.114,25.88)
MPU_SCL: R32.1 U2.61 U6.23 | length 14.3
  Top Layer w0.152: U2.61 14.514,18.15 13.183,19.482 13.183,23.301 14.757,24.876 14.757,26.035 14.91,26.187 16.358,26.187 16.489,26.056 R32.1@16.489,25.659
  Top Layer w0.254: U6.23 R32.1@16.489,25.659
MPU_SDA: R34.1 U2.62 U6.24 | length 12.7
  Top Layer w0.152: v1(13.919,24.714) 12.878,23.673 12.878,19.356 14.014,18.219 U2.62 ; v1(15.342,24.714) 15.964,24.714 U6.24@15.989,24.689
  Top Layer w0.254: R34.1 15.989,25.057 U6.24@15.989,24.689
  Bottom Layer w0.152: v1(13.919,24.714) v1(15.342,24.714)
NetC1_1: C1.1 U1.27 | length 4.3
  Bottom Layer w0.152: U1.27 23.482,10.197 C1.1
NetC2_1: C2.1 U1.28 | length 5.1
  Bottom Layer w0.152: U1.28 24.182,9.018 24.597,9.433 C2.1
NetC3_1: C3.1 U1.2 | length 3.8
  Bottom Layer w0.152: C3.1 5.982,9.634 U1.2
NetC3_2: C3.2 U1.3 | length 3.6
  Bottom Layer w0.152: C3.2 6.682,10.159 U1.3
NetC4_1: C4.1 U1.4 | length 3.5
  Bottom Layer w0.152: U1.4 7.382,10.206 C4.1
NetC4_2: C4.2 U1.5 | length 3.8
  Bottom Layer w0.152: U1.5 8.082,9.682 C4.2
NetC7_2: C7.2 U2.47 | length 4.1
  Top Layer w0.152: U2.47 24.027,13.74 v1(24.155,13.868)
  Bottom Layer w0.152: C7.2 23.8,12.624 24.155,12.979 v1(24.155,13.868)
NetC8_1: C8.1 U2.31 | length 2.6
  Top Layer w0.152: U2.31 20.014,3.786 20.193,3.607 20.853,3.607 21.072,3.388 C8.1
NetC25_1: C25.1 R24.1 R28.2 U3.3 | length 3.9
  Top Layer w0.254: U3.3 19.047,31.191 R28.2 19.251,29.441 R24.1
NetC25_2: C25.2 C26.2 L1.2 R20.2 R24.2 | length 5.4
  Top Layer w0.508: R24.2 21.097,29.439 21.148,29.388 ; C25.2 21.057,30.404
  Top Layer w0.635: 21.057,30.404 21.148,30.312 21.148,29.388 L1.2 C26.2
NetC29_1: C29.1 U6.20 | length 4.7
  Top Layer w0.152: U6.20 17.989,25.009 18.431,25.451 20.422,25.451 20.599,25.273 v1(20.599,24.841)
  Bottom Layer w0.152: C29.1 v1(20.599,24.841)
NetC31_1: C31.1 U6.10 | length 1.4
  Top Layer w0.254: C31.1@17.47,18.72 C31.1 17.489,18.84 U6.10
NetC38_2: C38.2 R41.2 U9.26 | length 4
  Top Layer w0.254: U9.26 29.114,25.149 R41.2 v1(30.325,25.474)
  Bottom Layer w0.254: C38.2 29.823,24.972 v1(30.325,25.474)
NetC41_2: C41.2 U9.27 | length 3.7
  Top Layer w0.254: U9.27 v1(28.614,25.896)
  Bottom Layer w0.254: C41.2 28.305,25.587 v1(28.614,25.896)
NetC42_1: C42.1 U9.1 | length 25
  Top Layer w0.254: U9.1 25.298,23.227 v1(25.298,26.238)
  Bottom Layer w0.254: C42.1 6.553,31.564 12.194,31.564 12.211,31.547 17.958,31.547 20.193,29.312 23.901,29.312 25.298,27.915 v1(25.298,26.238)
NetC42_2: C42.2 U10.4 | length 2.9
  Top Layer w0.254: v1(3.683,31.521) 4.041,31.521 U10.4
  Bottom Layer w0.254: v1(3.683,31.521) 4.914,31.521 C42.2
NetC43_1: C43.1 U9.2 | length 1.9
  Top Layer w0.254: v1(24.262,22.713) U9.2
  Bottom Layer w0.254: C43.1 23.674,22.713 v1(24.262,22.713)
NetC44_1: C44.1 U9.4 | length 10.7
  Top Layer w0.254: U9.4 24.21,21.713 23.733,22.19 23.733,28 24.507,28.774 C44.1
NetC44_2: C44.2 U11.4 | length 4.5
  Top Layer w0.254: C44.2 28.118,31.928 28.5,32.31 U11.4
NetC45_1: C45.1 U9.5 | length 2.4
  Top Layer w0.254: v1(24.13,20.955) 24.388,21.213 U9.5
  Bottom Layer w0.254: v1(24.13,20.955) C45.1
NetD1_2: D1.2 R14.2 | length 2.1
  Top Layer w0.152: v1(29.134,2.057) D1.2
  Bottom Layer w0.152: R14.2 v1(29.134,2.057)
NetL1_1: L1.1 U3.1 | length 3
  Top Layer w0.508: U3.1@17.382,29.88 U3.1
  Top Layer w0.635: U3.1@17.382,29.88 17.382,29.532 18.999,27.915 L1.1
NetMicro_USB1_2: Micro_USB1.2 R21.2 | length 2.1
  Top Layer w0.254: Micro_USB1.2 7.815,26.08 R21.2@7.821,26.086
NetMicro_USB1_3: Micro_USB1.3 R23.2 | length 2.2
  Top Layer w0.254: Micro_USB1.3 7.087,25.43 7.32,25.197 R23.2@7.821,25.197
NetMicro_USB1_4: Micro_USB1.4 R25.2 | length 2.2
  Top Layer w0.254: Micro_USB1.4 6.868,24.78 7.493,24.155 R25.2@7.668,24.155
NetR1_1: R1.1 U1.26 | length 3.3
  Bottom Layer w0.152: R1.1 22.782,10.213 U1.26
NetR7_1: R7.1 R8.1 SD1.9 | length 2.9
  Bottom Layer w0.254: SD1.9 17.863,13.716 R8.1 R7.1
NetR22_2: R22.2 U4.9 | length 1.4
  Top Layer w0.152: U4.9 15.282,28.188 R22.2
NetR26_2: R26.2 U4.2 | length 1.7
  Top Layer w0.152: R26.2 10.82,27.991 11.017,28.188 U4.2
NetR27_2: R27.2 U4.4 | length 1.7
  Top Layer w0.152: R27.2 10.897,27.102 11.182,27.388 U4.4
NetR33_1: R33.1 U5.2 | length 1.5
  Top Layer w0.152: U5.2 31.529,31.908 R33.1
NetR42_1: R42.1 U9.18 | length 1.4
  Top Layer w0.254: U9.18 31.722,20.213 R42.1
NRSET: C11.2 R15.2 S3.1 U2.7 | length 15.3
  Top Layer w0.152: v1(1.513,10.374) S3.1 2.544,7.976 5.893,7.976 6.706,8.788 8.359,8.788 9.22,9.65 9.22,10.871 9.589,11.24 U2.7
  Bottom Layer w0.152: R15.2 C11.2 1.002,9.863 v1(1.513,10.374)
OLED_CS: U1.13 U2.24 | length 7
  Top Layer w0.152: v1(14.529,3.404) 16.205,3.404 16.514,3.712 U2.24
  Bottom Layer w0.152: U1.13 13.682,4.53 14.529,3.683 v1(14.529,3.404)
OLED_DC: U1.15 U2.26 | length 8.7
  Top Layer w0.152: v1(15.723,2.362) 15.799,2.438 17.17,2.438 17.514,2.782 U2.26
  Bottom Layer w0.152: U1.15 15.082,4.832 15.723,4.191 v1(15.723,2.362)
OLED_MOSI: U1.19 U2.23 | length 9.2
  Top Layer w0.152: v1(16.002,9.601) 16.014,9.589 U2.23
  Bottom Layer w0.152: v1(16.002,9.601) 17.374,9.601 17.882,9.093 U1.19
OLED_RES: U1.14 U2.25 | length 7.8
  Top Layer w0.152: v1@15.113,2.896 16.637,2.896 17.014,3.273 U2.25
  Bottom Layer w0.152: U1.14 14.382,4.465 15.138,3.708 15.138,2.946 v1(15.113,2.921)
OLED_SCK: U1.18 U2.21 | length 9
  Top Layer w0.152: U2.21 v1@15.014,9.322
  Bottom Layer w0.152: v1@15.014,9.398 v1@15.078,9.335 ; v1(15.065,9.322) 15.264,9.123 16.912,9.123 17.196,8.839 17.196,6.974 U1.18
OSC32_IN: C20.2 U2.3 Y2.1 | length 7.1
  Top Layer w0.152: C20.2 7.955,16.972 Y2.1 9.017,15.24 9.017,13.792 9.569,13.24 U2.3
OSC32_OUT: C21.2 U2.4 Y2.2 | length 6.2
  Top Layer w0.152: C21.2 6.399,13.921 Y2.2 8.801,12.74 U2.4
OSC_IN: C18.2 U2.5 Y1.1 | length 5.3
  Top Layer w0.152: C18.2 7.115,12.24 U2.5
OSC_OUT: C19.2 U2.6 Y1.3 | length 9.4
  Top Layer w0.152: Y1.3 5.263,9.845 5.263,9.093 ; C19.2 5.263,9.093 ; U2.6 9.454,11.74 8.788,11.074 8.788,9.649 8.233,9.093 5.263,9.093
PG_STAT: R29.2 U2.9 U4.5 | length 18.9
  Top Layer w0.152: U2.9 11.891,10.24 v1(12.141,10.49) ; U4.5 11.806,25.809 12.698,25.809 v1(12.725,25.781)
  Bottom Layer w0.152: v1(12.141,10.49) 12.141,25.197 v1(12.725,25.781)
POWER_ADC: C22.2 R18.2 R19.1 U2.27 | length 39.9
  Top Layer w0.254: R18.2 15.748,32.512 C22.2 15.773,32.004 16.027,31.75 16.51,31.75 ; v1(15.215,10.338) 16.307,10.338 18.014,8.631 U2.27 ; v1(18.313,26.924) 18.313,27.61 16.51,29.413 16.51,31.75 ; R19.1 18.694,32.106 18.317,31.729 16.531,31.729 16.51,31.75
  Bottom Layer w0.254: v1(15.215,10.338) 13.644,11.909 13.644,13.554 13.665,13.576 13.665,22.758 14.529,23.622 17.374,23.622 18.313,24.562 v1(18.313,26.924)
SD_CD/DATA3: R3.1 SD1.2 U2.52 | length 18.7
  Top Layer w0.254: v1(14.783,13.818) 14.83,13.771 18.586,13.771 19.014,14.199 U2.52
  Bottom Layer w0.254: v1@14.761,13.818 14.761,20.578 15.526,21.343 SD1.2 18.701,21.343 19.101,21.742 R3.1
SD_CLK: SD1.5 U2.53 | length 10.7
  Top Layer w0.254: v1(15.316,14.3) 18.085,14.3 18.514,14.729 U2.53
  Bottom Layer w0.254: v1(15.316,14.3) 15.379,14.3 15.85,14.771 15.85,17.628 16.265,18.043 SD1.5
SD_CMD: R4.1 SD1.3 U2.54 | length 13.5
  Top Layer w0.254: v1@15.291,14.961 17.704,14.961 18.014,15.271 U2.54
  Bottom Layer w0.254: v1@15.291,14.961 v1(15.291,15.037) 15.291,19.66 15.874,20.243 SD1.3 18.922,20.243 19.406,20.726 R4.1
SD_DATA0: R5.1 SD1.7 U2.39 | length 15.9
  Top Layer w0.254: v1(17.399,10.566) 18.898,10.566 19.724,9.74 U2.39
  Bottom Layer w0.254: v1(17.399,10.566) 16.135,10.566 15.342,11.359 15.342,13.097 16.129,13.884 16.129,14.364 16.332,14.568 16.332,15.443 16.732,15.843 SD1.7 17.847,15.9 R5.1
SD_DATA1: R6.1 SD1.8 U2.40 | length 13.7
  Top Layer w0.254: v1(18.034,11.125) 18.923,11.125 19.808,10.24 U2.40
  Bottom Layer w0.254: v1(18.034,11.125) 16.151,11.125 15.802,11.473 15.802,11.477 15.748,11.532 15.748,12.929 16.535,13.716 16.535,14.196 17.082,14.743 SD1.8 17.855,14.808 R6.1
SD_DATA2: R2.1 SD1.1 U2.51 | length 22.3
  Top Layer w0.254: v1@14.224,13.259 19.025,13.259 19.514,13.748 U2.51
  Bottom Layer w0.254: v1(14.173,13.335) 14.173,21.514 15.102,22.443 SD1.1 19.392,22.443 R2.1
SD_SD: R8.2 U2.55 | length 9.7
  Top Layer w0.254: U2.55 17.514,17.285 17.911,17.682 21.256,17.682 v1(21.666,17.272)
  Bottom Layer w0.254: R8.2 21.361,13.716 21.666,14.021 v1(21.666,17.272)
SENSORS_I2C_SCL: R36.1 U2.29 U5.6 U7.5 U8.6 | length 46.3
  Top Layer w0.254: U2.29 19.014,3.191 19.012,3.189 19.012,2.45 19.014,2.448 19.014,2.373 19.228,2.159 27.94,2.159 28.88,3.099 31.547,3.099 31.928,3.48 v1(31.928,5.664) 32.969,5.664 U7.5 ; U5.6 32.57,28.263 v1(32.893,27.94)
  Bottom Layer w0.254: R36.1 v1(31.928,5.664) 32.69,5.664 33.198,6.172 33.198,12.868 ; U8.6 33.198,12.868 ; v1(32.893,27.94) 33.198,27.635 33.198,12.868
SENSORS_I2C_SDA: R35.1 U2.30 U5.4 U7.6 U8.1 | length 46.9
  Top Layer w0.254: U2.30 19.514,5.417 19.863,5.766 28.296,5.766 28.854,6.325 32.766,6.325 32.972,6.53 U7.6 32.972,8.052 ; U5.4 31.029,26.959 31.394,26.594 32.588,26.594 32.972,26.21 32.972,8.052 ; v1(32.258,8.001) 32.921,8.001 32.972,8.052
  Bottom Layer w0.254: U8.1 28.38,12.286 28.931,11.735 28.931,9.169 29.213,8.887 R35.1 v1(32.258,8.001)
SWCLK: R12.2 SWD_UART1.2 U2.49 | length 8.5
  Top Layer w0.152: U2.49 20.529,16.332 R12.2 24.483,14.506 24.755,14.234 26.985,14.234 SWD_UART1.2
SWDIO: R11.2 SWD_UART1.3 U2.46 | length 4.6
  Top Layer w0.152: U2.46 24.978,13.24 R11.2 25.428,13.685 SWD_UART1.3
UART2_RX: T2.1 U2.17 | length 12.7
  Top Layer w0.254: v1(3.175,2.87) 3.378,3.073 9.541,3.073 10.295,3.827 12.743,3.827 13.014,4.099 U2.17
  Bottom Layer w0.254: T2.1 3.175,1.524 v1(3.175,2.87)
UART2_TX: T1.1 U2.16 | length 12.3
  Top Layer w0.254: v1(2.337,3.48) 9.373,3.48 10.962,5.07 U2.16
  Bottom Layer w0.254: T1.1 2.337,3.404 v1(2.337,3.48)
UART_RX: SWD_UART1.4 U2.43 | length 5
  Top Layer w0.152: U2.43 24.313,11.74 25.715,13.142 26.985,13.142 SWD_UART1.4
UART_TX: SWD_UART1.5 U2.42 | length 5
  Top Layer w0.152: U2.42 24.296,11.24 25.741,12.685 SWD_UART1.5
USB_DM: R21.1 U2.44 | length 27.3
  Top Layer w0.254: R21.1 8.484,26.162 8.418,26.096 8.418,24.831 8.56,24.689 11.151,24.689 11.735,24.105 11.735,15.265 12.395,14.605 12.395,13.243 13.37,12.268 19.934,12.268 19.962,12.24 U2.44
USB_DP: R23.1 U2.45 | length 24.9
  Top Layer w0.254: R23.1@9.017,25.197 11.481,25.197 12.141,24.536 12.141,15.469 12.903,14.707 12.903,13.31 13.473,12.74 U2.45
USB_ID: R25.1 U2.15 | length 24.8
  Top Layer w0.254: R25.1 10.744,24.155 v1(10.82,24.079) ; U2.15 13.943,7.24 14.376,7.673 v1(14.376,9.754)
  Bottom Layer w0.254: v1(10.82,24.079) 10.82,10.744 11.811,9.754 v1(14.376,9.754)
V_BAT: BAT1.2 C23.2 C24.2 R18.1 U3.4 U3.5 U4.10 | length 12.3
  Top Layer w0.254: 13.96,30.541 U3.5
  Top Layer w0.635: BAT1.2 10.643,31.674 11.151,32.182 12.395,32.182 13.261,31.316 R18.1 ; 13.919,28.788 v2(13.919,29.845) R18.1 ; U3.4 14.044,31.191 R18.1
  Bottom Layer w0.635: C24.2 13.03,29.845 v2(13.919,29.845) C23.2
VBUS: Micro_USB1.1 U4.1 | length 7.9
  Top Layer w0.254: Micro_USB1.1 5.733,26.924
  Top Layer w0.635: 5.733,26.924 5.733,28.187 6.477,28.931 11.887,28.931
WM_3V3: C39.1 C46.1 C47.1 R40.1 R41.1 U9.13 U9.14 U9.31 U10.1 U11.1 | length 21.9
  Top Layer w0.254: U10.1 6.375,30.887 v1(6.375,29.896) ; R40.1 25.031,30.188 v1(25.476,29.743) ; U9.31 26.614,25.269 26.786,25.441 v1(26.786,26.427) ; U9.13 28.114,18.114 28.27,17.958 28.575,17.958 ; U9.14 28.614,17.997 28.575,17.958 ; U11.1 29.439,30.469 v1(29.439,28.372) R41.1 ; v1(30.226,18.237) 29.947,17.958 28.575,17.958
  Bottom Layer w0.254: C46.1 v1(26.786,26.427) ; C47.1 C39.1 29.88,19.371 30.226,19.025 v1(30.226,18.237)
pads on no net: Micro_USB1.MH1 Micro_USB1.MH2 S1.0 S2.0 S3.0 SD1.0 U1.7 U1.20 U2.20 U2.22 U2.35 U2.36 U2.41 U2.50 U2.56 U2.57 U4.6 U4.7 U6.2 U6.3 U6.4 U6.5 U6.6 U6.7 U6.11 U6.12 U6.14 U6.15 U6.16 U6.17 U6.19 U6.21 U6.22 U7.1 U7.4 U8.3 U8.4 U9.3 U9.6 U9.15 U9.19 U9.20 U9.21 U9.22 U9.23 U9.25 U9.29 U9.30

## Polygon pours and split planes (outlines as drawn)
GND on Top Layer "Bottom_GND" (solid, remove dead copper, pour order 16): 24.638,-0.127 31.496,-0.127 ccw(c31.496,2.413) 34.036,2.413 34.036,3.15 34.036,30.912 ccw(c31.496,30.912) 31.496,33.452 30.836,33.452 2.489,33.452 ccw(c2.489,30.912) -0.051,30.912 -0.051,29.032 -0.051,2.388 ccw(c2.489,2.388) 2.489,-0.152 6.096,-0.152 6.096,0.965 cw(c6.731,0.965) 6.731,1.6 24.054,1.6 cw(c24.054,1.016) 24.638,1.016 24.638,-0.076 ccw(c24.663,-0.076) 24.663,-0.102
GND on Bottom Layer "GND" (solid, remove dead copper, pour order 3): 24.765,-0.127 31.496,-0.127 ccw(c31.496,2.413) 34.036,2.413 34.036,3.048 34.036,30.912 ccw(c31.496,30.912) 31.496,33.452 31.358,33.452 2.438,33.452 ccw(c2.438,30.912) -0.102,30.912 -0.102,24.511 -0.102,2.432 ccw(c2.438,2.432) 2.438,-0.108 6.092,-0.108 6.092,1.012 cw(c6.68,1.012) 6.68,1.6 24.105,1.6 cw(c24.105,1.067) 24.638,1.067 24.638,0 ccw(c24.765,0) 24.765,-0.127
GND on GND (split plane): 172 vertices, not listed, extent 0.383,-4.269 33.526,37.619
WM_3V3 on VCC (split plane): 31.241,28.359 31.241,17.121 28.512,17.121 27.236,18.397 27.204,18.421 27.167,18.436 27.127,18.442 25.864,18.442 25.858,18.447 25.821,18.462 25.781,18.467 25.681,18.467 25.681,27.559 25.675,27.599 25.66,27.636 25.636,27.668 25.001,28.303 24.969,28.327 24.932,28.342 24.892,28.348 5.234,28.348 5.234,31.19 28.41,31.19
3V3_OLED on VCC (split plane): 25.373,18.442 25.298,18.442 25.259,18.436 25.222,18.421 25.184,18.436 25.145,18.442 25.105,18.436 25.068,18.421 25.036,18.397 25.012,18.365 24.996,18.328 24.991,18.288 24.991,17.639 22.802,15.45 22.778,15.418 22.762,15.381 22.757,15.342 22.757,10.147 20.712,8.102 20.701,8.104 18.237,8.104 18.197,8.099 18.16,8.083 18.129,8.059 18.128,8.059 16.167,6.097 10.16,6.097 10.12,6.092 10.083,6.077 10.051,6.052 9.62,5.62 9.595,5.589 9.58,5.552 9.574,5.512 9.574,3.583 8.039,3.583 7.926,3.696 7.926,4.547 7.926,7.238 13.741,7.238 13.781,7.243 13.818,7.258 13.85,7.283 15.222,8.654 19.895,13.328 19.92,13.36 19.935,13.397 19.94,13.437 19.972,13.461 19.997,13.493 20.012,13.53 20.017,13.57 20.017,17.895 20.307,18.185 22.936,18.185 22.976,18.19 23.013,18.206 23.045,18.23 23.959,19.145 23.984,19.176 23.999,19.213 24.004,19.253 24.004,20.676 23.999,20.715 23.984,20.752 23.959,20.784 22.715,22.029 22.683,22.053 22.646,22.069 22.606,22.074 20.269,22.074 20.229,22.069 20.192,22.053 20.161,22.029 20.16,22.029 19.94,21.809 19.94,24.179 25.373,24.179
MCU_3V3 on VCC (split plane): 14.959,20.942 14.959,8.827 13.678,7.545 7.772,7.545 7.733,7.54 7.696,7.525 7.664,7.5 7.639,7.468 7.624,7.431 7.619,7.391 7.619,4.547 7.619,3.632 7.624,3.592 7.639,3.555 7.664,3.524 7.867,3.32 7.899,3.296 7.936,3.281 7.976,3.275 9.652,3.275 9.692,3.281 9.729,3.296 9.761,3.32 9.785,3.352 9.791,3.366 9.805,3.372 9.837,3.397 9.861,3.428 9.877,3.465 9.882,3.505 9.882,5.448 10.224,5.79 16.231,5.79 16.27,5.795 16.307,5.81 16.339,5.835 18.301,7.796 20.701,7.796 20.739,7.802 20.777,7.796 20.817,7.802 20.854,7.817 20.886,7.842 23.045,10.001 23.069,10.032 23.085,10.069 23.09,10.109 23.085,10.149 23.069,10.186 23.065,10.192 23.065,15.278 25.253,17.467 25.278,17.499 25.293,17.536 25.298,17.575 25.298,18.134 27.064,18.134 28.142,17.056 28.142,15.202 25.393,12.453 25.368,12.421 25.353,12.384 25.348,12.344 25.348,5.158 24.486,5.158 24.446,5.152 24.42,5.141 24.409,5.137 24.395,5.126 24.377,5.112 23.025,3.761 21.4,3.761 20.149,5.011 20.117,5.035 20.08,5.051 20.041,5.056 14.199,5.056 14.159,5.051 14.122,5.035 14.09,5.011 12.007,2.928 12.003,2.922 7.52,2.922 6.986,3.456 6.986,8.191 8.465,9.67 8.49,9.702 8.505,9.739 8.51,9.779 8.51,21.944 13.957,21.944
BH_VCC on VCC (split plane): 173 vertices, not listed, extent 3.634,3.532 33.526,37.619
3V3 on VCC (split plane): 3.326,25.552 3.331,25.513 3.347,25.476 3.371,25.444 5.86,22.955 6.572,22.243 6.725,22.089 6.729,22.058 6.745,22.021 6.769,21.989 6.801,21.965 6.838,21.95 6.878,21.944 8.203,21.944 8.203,9.843 6.724,8.364 6.699,8.332 6.684,8.295 6.679,8.255 6.679,3.392 6.684,3.353 6.699,3.316 6.724,3.284 7.348,2.66 7.38,2.635 7.417,2.62 7.456,2.615 12.065,2.615 12.105,2.62 12.142,2.635 12.174,2.66 12.196,2.689 12.224,2.711 14.262,4.748 19.977,4.748 21.227,3.498 21.259,3.474 21.296,3.458 21.336,3.453 23.089,3.453 23.128,3.458 23.165,3.474 23.197,3.498 24.549,4.85 25.348,4.85 25.348,3.378 25.353,3.338 25.368,3.301 25.393,3.27 25.425,3.245 25.462,3.23 25.502,3.224 33.526,3.224 33.526,2.54 33.526,2.399 33.489,2.118 33.416,1.845 33.308,1.584 33.166,1.339 32.994,1.115 32.794,0.915 32.57,0.743 32.325,0.601 32.064,0.493 31.791,0.42 31.51,0.383 30.111,0.383 30.012,0.373 29.916,0.344 29.828,0.297 29.751,0.234 29.735,0.218 29.672,0.141 29.625,0.053 29.596,-0.043 29.586,-0.143 29.586,-1.883 29.586,-2.039 29.545,-2.349 29.464,-2.651 29.344,-2.94 29.188,-3.211 28.997,-3.46 28.776,-3.681 28.528,-3.871 28.257,-4.028 27.968,-4.147 27.666,-4.228 27.356,-4.269 6.621,-4.269 6.311,-4.228 6.009,-4.147 5.72,-4.028 5.449,-3.871 5.201,-3.681 4.98,-3.46 4.789,-3.211 4.633,-2.94 4.513,-2.651 4.432,-2.349 4.391,-2.039 4.391,-1.883 4.391,-0.127 4.381,-0.028 4.352,0.068 4.305,0.156 4.242,0.234 4.164,0.297 4.076,0.344 3.98,0.373 3.881,0.383 2.399,0.383 2.118,0.42 1.845,0.493 1.584,0.601 1.339,0.743 1.115,0.915 0.915,1.115 0.743,1.339 0.601,1.584 0.493,1.845 0.42,2.118 0.383,2.399 0.383,2.528 0.383,2.53 0.383,2.531 0.383,2.533 0.387,2.571 0.388,30.785 0.388,30.926 0.425,31.207 0.498,31.48 0.606,31.741 0.748,31.986 0.92,32.21 1.12,32.41 1.344,32.582 1.589,32.723 1.85,32.832 2.123,32.905 2.404,32.942 3.326,32.942

## Keep-outs
Keep-Out Layer:
  lines w0.254: 0,2.54 ccw(c2.54,2.54) 2.54,0 4.034,0 ; 0.005,2.545 0.005,30.785 cw(c2.545,30.785) 2.545,33.325 3.835,33.325 ; 6.015,-1.322 ccw(c7.411,-1.322) 7.411,-2.718 26.541,-2.718 ccw(c26.541,-1.37) 27.889,-1.37 27.889,-0.051 24.816,-0.051 ; 6.02,-1.322 6.02,0 6.02,1.067 cw(c6.68,1.067) 6.68,1.727 24.105,1.727 cw(c24.105,1.067) 24.765,1.067 24.765,0 ; 27.864,33.325 5.994,33.325 5.994,34.72 cw(c7.342,34.72) 7.342,36.068 26.472,36.068 cw(c26.472,34.672) 27.868,34.672 ; 27.864,33.35 27.864,34.672 ; 29.875,33.325 31.369,33.325 cw(c31.369,30.785) 33.909,30.785 ; 30.023,0 31.369,0 ccw(c31.369,2.54) 33.909,2.54 33.909,30.937
  lines w0.305: 3.861,33.35 3.94,33.43 3.94,35.233 cw(c6.684,35.233) 6.684,37.977 27.106,37.977 cw(c27.106,35.233) 29.85,35.233 29.85,33.35 ; 4.034,0 4.034,-1.883 ccw(c6.778,-1.883) 6.778,-4.627 27.199,-4.627 ccw(c27.199,-1.883) 29.943,-1.883 29.943,-0.079 30.023,0

## Other copper
VCC (plane layer: these items are gaps in the copper):
  lines w0.305: 3.48,33.376 3.48,25.552 5.969,23.063 6.878,22.154 6.68,22.352 ; 6.878,22.098 14.021,22.098 15.113,21.006 15.113,8.763 ; 8.357,22.098 8.357,9.779 6.833,8.255 6.833,3.392 7.456,2.769 12.065,2.769 ; 9.652,3.429 7.976,3.429 7.772,3.632 7.772,4.547 7.772,7.391 13.741,7.391 19.787,13.437 ; 9.728,3.505 9.728,5.512 10.16,5.944 12.167,5.944 16.231,5.944 18.237,7.95 20.701,7.95 ; 12.116,2.819 14.199,4.902 20.041,4.902 21.336,3.607 23.089,3.607 24.486,5.004 25.502,5.004 ; 19.863,13.57 19.863,17.958 20.244,18.339 22.936,18.339 23.851,19.253 23.851,20.676 22.606,21.92 20.269,21.92 19.787,21.438 19.787,24.333 25.527,24.333 ; 20.777,7.95 22.936,10.109 ; 22.911,10.135 22.911,15.342 25.145,17.575 25.145,18.288 ; 25.298,18.288 27.127,18.288 28.448,16.967 30.683,16.967 31.394,16.967 31.394,28.423 28.473,31.344 5.08,31.344 5.08,28.194 5.74,28.194 24.892,28.194 25.527,27.559 25.527,18.313 25.781,18.313 ; 27.864,17.551 28.296,17.12 28.296,15.138 25.502,12.344 25.502,3.378 33.934,3.378